# Altium PCB EM_Power_V2.PcbDoc (part 3 of 3)
Units mm, origin at the board's own origin, x right, y up, seen from the top; angles counter-clockwise.
Board outline 82 x 56 mm, 2 copper layers (Top Layer, Bottom Layer); 82 components, 61 nets, 273 pads, 201 vias.
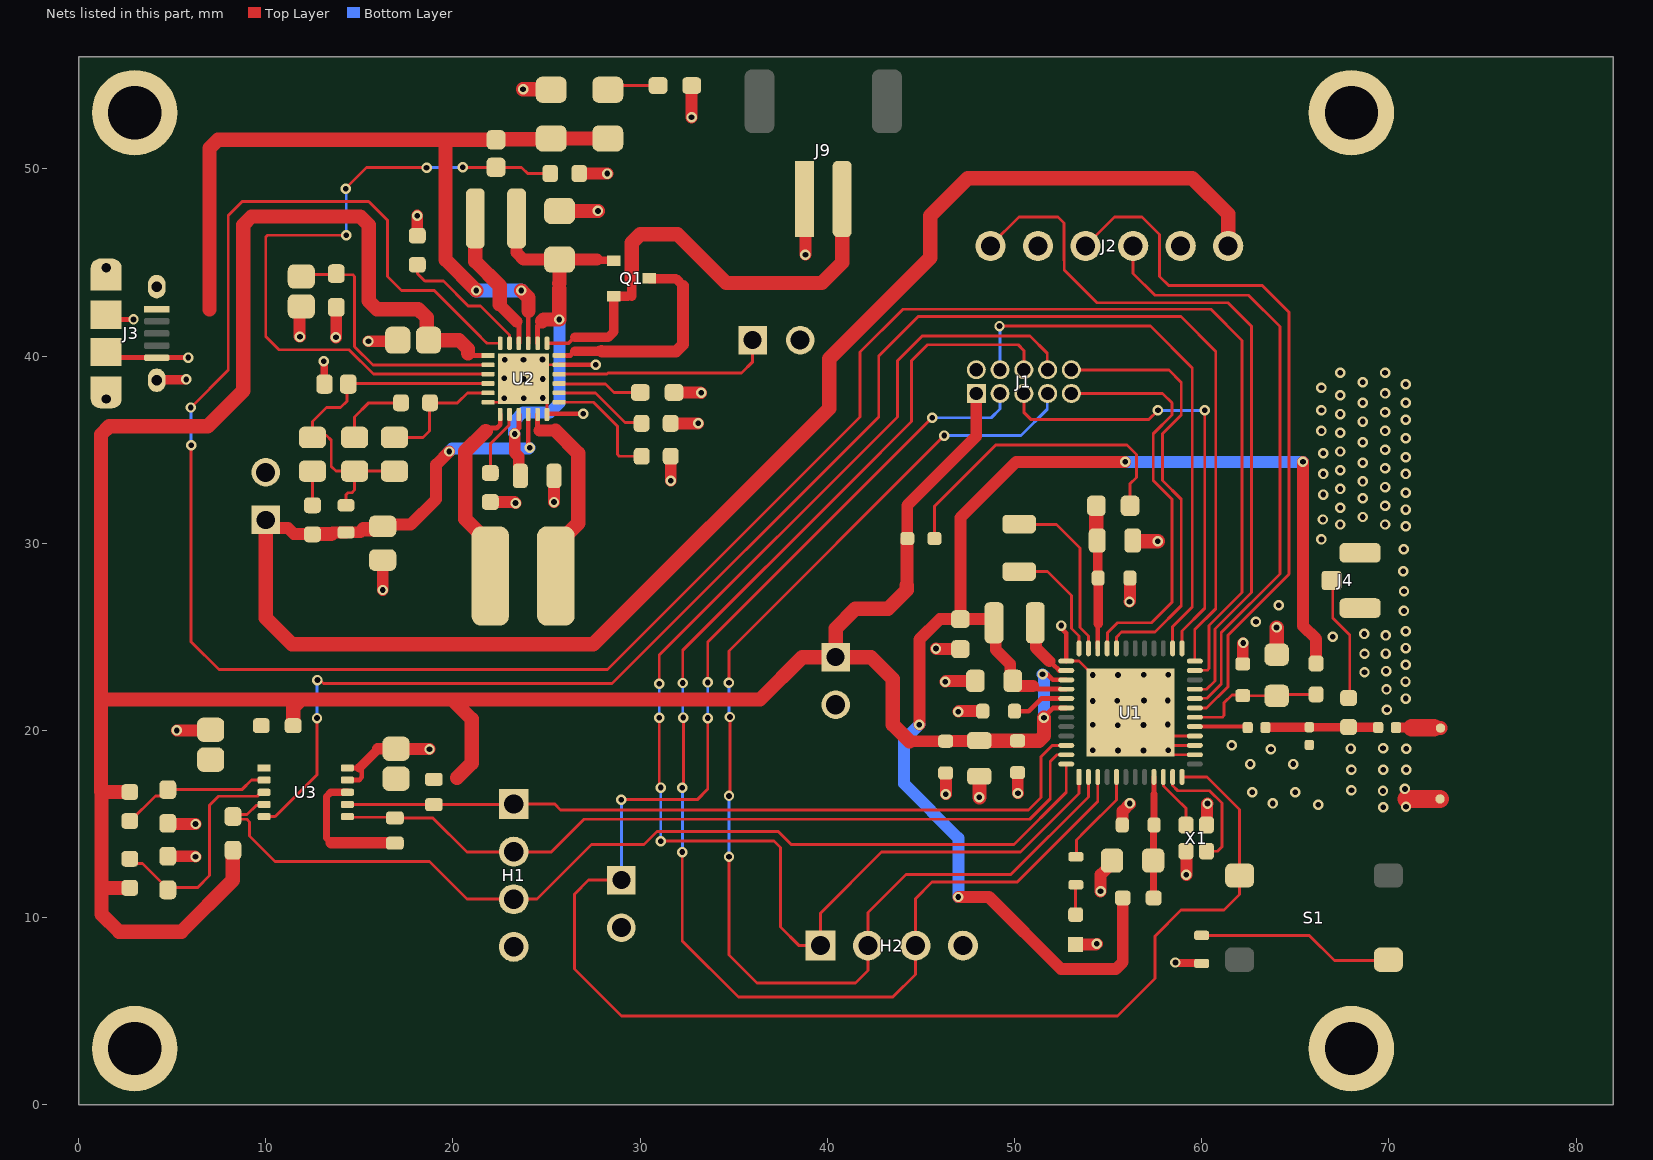
[diagram p2: the nets of this part, all layers, seen from the top]

## Part data (continued)
R8: library part RNCS0603BKE3K01, "RES SMD 3.01KOHM 0.1% 1/16W 0603", Case Code (Imperial)=0603, Case Code (Metric)=1608, Manufacturer="Stackpole Electronics", Max Operating Temperature=155°C, Max Power Dissipation=63mW, Min Operating Temperature=-55°C, Resistance=3.01kR, Resistor Type="Thin Film", Supplier Part Number 1=RNCS0603BKE3K01CT-ND, Temperature Coefficient=25ppm/°C, Tolerance=0.1%, Case/Package=0603, Category="Chip SMD Resistors", ComponentLink1Description=https://datasheet.ciiva.com/2528/sei-rncs-rnch-2528531.pdf?src-supplier=Digi-Key, ComponentLink1URL=https://datasheet.ciiva.com/2528/sei-rncs-rnch-2528531.pdf?src-supplier=Digi-Key, ComponentLink2Description=https://datasheet.ciiva.com/2528/sei-rncs-rnch-2528532.pdf?src-supplier=Digi-Key, ComponentLink2URL=https://datasheet.ciiva.com/2528/sei-rncs-rnch-2528532.pdf?src-supplier=Digi-Key, ComponentLink3Description=https://datasheet.ciiva.com/2528/sei-rncs-rnch-2528533.pdf?src-supplier=Digi-Key, ComponentLink3URL=https://datasheet.ciiva.com/2528/sei-rncs-rnch-2528533.pdf?src-supplier=Digi-Key, Contact Plating=Tin,Matte, Features="Moisture Resistant,Automotive AEC-Q200", Height=0.022inch, Lead Free="Lead Free", Length=0.061inch, Manufacturer Part Number=RNCS0603BKE3K01, Mount="Surface Mount", Number of Terminations=2, Packaging="Tape and Reel", Pricing 1="1=0.45000, 10=0.34500, 100=0.14500 (USD)", Radiation Hardening=No, RoHS=Yes, Stock 1=9600, Supplier 1=Digi-Key, Width=0.031inch
R9: library part 9-1879336-1, "RES SMD 2K OHM 1% 1/16W 0603", Case Code (Imperial)=0603, Case Code (Metric)=1608, Manufacturer="TE Connectivity", Max Operating Temperature=155°C, Max Power Dissipation=63mW, Min Operating Temperature=-55°C, Package Quantity=1000, Resistance=2kR, Resistor Type="Thin Film", Supplier Part Number 1=A102250CT-ND, Temperature Coefficient=50ppm/°C, Tolerance=1%, Case/Package=0603, Category="Chip SMD Resistors", ComponentLink1Description=https://datasheet.ciiva.com/2525/eng-cd-1879336-ba1-pdf-c-1879336-drw-2525209.pdf?src-supplier=Digi-Key, ComponentLink1URL=https://datasheet.ciiva.com/2525/eng-cd-1879336-ba1-pdf-c-1879336-drw-2525209.pdf?src-supplier=Digi-Key, Depth=0.8mm, Height=0.022inch, Lead Free="Lead Free", Length=0.061inch, Manufacturer Part Number=9-1879336-1, Military Standard=Not, Number of Terminations=2, Packaging="Tape and Reel", Pricing 1="1=0.17000, 10=0.14400, 100=0.05630 (USD)", Radiation Hardening=No, RoHS=Yes, Stock 1=17358, Supplier 1=Digi-Key, Width=0.031inch
R18: library part RMCF0603FT5K23, "RES SMD 5.23K OHM 1% 1/10W 0603", Case Code (Imperial)=0603, Case Code (Metric)=1608, Manufacturer="Stackpole Electronics", Max Operating Temperature=155°C, Max Power Dissipation=100mW, Min Operating Temperature=-55°C, Resistance=5.23kR, Resistor Type="Thick Film", Supplier Part Number 1=RMCF0603FT5K23CT-ND, Temperature Coefficient=100ppm/°C, Tolerance=1%, Case/Package=0603, Category="Chip SMD Resistors", ComponentLink1Description=https://www.seielect.com/Catalog/SEI-RMCF_RMCP.pdf?src-supplier=Digi-Key, ComponentLink1URL=https://www.seielect.com/Catalog/SEI-RMCF_RMCP.pdf?src-supplier=Digi-Key, ComponentLink2Description=https://www.seielect.com/catalog/SEI-Packaging.pdf?src-supplier=Digi-Key, ComponentLink2URL=https://www.seielect.com/catalog/SEI-Packaging.pdf?src-supplier=Digi-Key, ComponentLink3Description=https://www.seielect.com/catalog/SEI-RMCF_RMCP.pdf?src-supplier=Avnet, ComponentLink3URL=https://www.seielect.com/catalog/SEI-RMCF_RMCP.pdf?src-supplier=Avnet, Contact Plating=Tin,Matte, Features="Automotive AEC-Q200", Height=0.022inch, Lead Free="Lead Free", Length=0.061inch, Manufacturer Part Number=RMCF0603FT5K23, Mount="Surface Mount", Number of Terminations=2, Packaging="Tape and Reel", Pricing 1="1=0.10000, 10=0.01500, 100=0.00590, 1000=0.00265, 2500=0.00230 (USD)", Radiation Hardening=No, RoHS=Yes, Stock 1=51613, Supplier 1=Digi-Key, Width=0.031inch
R19 R26 R27: library part CPF0603F10KC1, "Res Thin Film 0603 10K Ohm 1% 1/16W ±50ppm/°C Molded SMD SMD Paper T/R", Case Code (Imperial)=0603, Case Code (Metric)=1608, Manufacturer="TE Connectivity Neohm", Max Operating Temperature=155°C, Min Operating Temperature=-55°C, Number of Resistors=1, Power Rating=63mW, Resistance=10kR, Resistor Type="Thin Film", Supplier Part Number 1=A102203CT-ND, Temperature Coefficient=50ppm/°C, Tolerance=1%, Voltage Rating=50V, Case/Package=0603, Category="Chip SMD Resistors", ComponentLink1Description=https://datasheet.ciiva.com/7789/eng-ds-1773200-j-7789563.pdf?src-supplier=Element14, ComponentLink1URL=https://datasheet.ciiva.com/7789/eng-ds-1773200-j-7789563.pdf?src-supplier=Element14, ComponentLink2Description=https://datasheet.ciiva.com/22692/1786775-22692861.pdf?src-supplier=Element14, ComponentLink2URL=https://datasheet.ciiva.com/22692/1786775-22692861.pdf?src-supplier=Element14, ComponentLink3Description=https://datasheet.ciiva.com/24494/29261eng-ds-1773200-f-24494553.pdf?src-supplier=Onlinecomponents.com, ComponentLink3URL=https://datasheet.ciiva.com/24494/29261eng-ds-1773200-f-24494553.pdf?src-supplier=Onlinecomponents.com, ELV=Compliant, Manufacturer Part Number=CPF0603F10KC1, Mount="Surface Mount", Number of Pins=2, Number of Terminations=2, Packaging="Tape and Reel", Pricing 1="1=0.17000, 10=0.14400, 100=0.05630 (USD)", Radiation Hardening=No, REACH SVHC=Unknown, RoHS=Yes, Stock 1=42911, Supplier 1=Digi-Key, Termination=Solder, Voltage Rating (DC)=50V, Width=0.8mm
R20 R21: library part MCT06030C4701FP500, "RES SMD 4.7K OHM 1% 1/8W 0603", Case Code (Imperial)=0603, Case Code (Metric)=1608, Manufacturer="Vishay Beyschlag", Max Operating Temperature=125°C, Max Power Dissipation=125mW, Min Operating Temperature=-55°C, Package Quantity=1, Resistance=4.7kR, Resistor Type="Thin Film", Supplier Part Number 1=MCT0603-4.70K-CFCT-ND, Temperature Coefficient=50ppm/°C, Tolerance=1%, Voltage Rating=75V, Case/Package=0603, Category="Chip SMD Resistors", ComponentLink1Description=https://datasheet.ciiva.com/8897/mc-pro-8897829.pdf?src-supplier=Avnet, ComponentLink1URL=https://datasheet.ciiva.com/8897/mc-pro-8897829.pdf?src-supplier=Avnet, ComponentLink2Description=https://datasheet.ciiva.com/2525/mc-pro-2525199.pdf?src-supplier=Digi-Key, ComponentLink2URL=https://datasheet.ciiva.com/2525/mc-pro-2525199.pdf?src-supplier=Digi-Key, ComponentLink3Description=https://datasheet.ciiva.com/16452/mc-pro-16452668.pdf?src-supplier=Future+Electronics, ComponentLink3URL=https://datasheet.ciiva.com/16452/mc-pro-16452668.pdf?src-supplier=Future+Electronics, ComponentLink4Description=https://datasheet.ciiva.com/2525/mc-pro-2525197.pdf?src-supplier=Digi-Key, ComponentLink4URL=https://datasheet.ciiva.com/2525/mc-pro-2525197.pdf?src-supplier=Digi-Key, ComponentLink5Description=https://datasheet.ciiva.com/2525/mc-pro-2525198.pdf?src-supplier=Digi-Key, ComponentLink5URL=https://datasheet.ciiva.com/2525/mc-pro-2525198.pdf?src-supplier=Digi-Key, Contact Plating=Tin, Depth=0.85mm, Height=0.022inch, Lead Free="Lead Free", Length=1.55mm, Manufacturer Part Number=MCT06030C4701FP500, Military Standard=Not, Mount="Surface Mount", Number of Terminations=2, Packaging="Tape and Reel", Power Rating=125mW, Pricing 1="1=0.16000, 10=0.13200, 100=0.05160, 1000=0.02160, 2500=0.01980 (USD)", Radiation Hardening=No, REACH SVHC="No SVHC", RoHS=Yes, Stock 1=67430, Supplier 1=Digi-Key, Voltage Rating (DC)=75V, Width=0.033inch
R22: library part SR0603FR-7T330RL, "RES SMD 0603 1/4W 1% 330 OHM", Manufacturer=Yageo, Supplier Part Number 1=YAG5835CT-ND, Category="Chip SMD Resistors", ComponentLink1Description=http://www.yageo.com/documents/recent/PYu-SR_D_F%20tol_RoHS_L_3.pdf?src-supplier=Digi-Key, ComponentLink1URL=http://www.yageo.com/documents/recent/PYu-SR_D_F%20tol_RoHS_L_3.pdf?src-supplier=Digi-Key, Manufacturer Part Number=SR0603FR-7T330RL, Pricing 1="1=0.71000, 10=0.52500, 100=0.30570, 1000=0.17143, 2500=0.16797 (USD)", RoHS=No, Stock 1=4990, Supplier 1=Digi-Key
S1: library part PTS645SL50SMTR92LFS, "TACTILE SWITCH, SPST, 0.05A, 12VDC", Color=Black, Current Rating=50mA, Manufacturer="ITT C&K", Max Operating Temperature=60°C, Max Voltage Rating (DC)=12V, Min Operating Temperature=-20°C, Operating Force=1.27N, Package Quantity=1, Supplier Part Number 1=CKN9088CT-ND, Actuator Material=Nylon,Polyamide, Actuator Type=Standard, Category="Tactile Switches", ComponentLink1Description=https://datasheet.ciiva.com/26927/getdatasheetpartid-760859-26927133.pdf?src-supplier=Verical, ComponentLink1URL=https://datasheet.ciiva.com/26927/getdatasheetpartid-760859-26927133.pdf?src-supplier=Verical, ComponentLink2Description=https://datasheet.ciiva.com/14920/pts645-14920742.pdf?src-supplier=Digi-Key, ComponentLink2URL=https://datasheet.ciiva.com/14920/pts645-14920742.pdf?src-supplier=Digi-Key, ComponentLink3Description=https://datasheet.ciiva.com/14920/pts645-14920743.pdf?src-supplier=Digi-Key, ComponentLink3URL=https://datasheet.ciiva.com/14920/pts645-14920743.pdf?src-supplier=Digi-Key, ComponentLink4Description=https://datasheet.ciiva.com/14920/pts645-14920744.pdf?src-supplier=Digi-Key, ComponentLink4URL=https://datasheet.ciiva.com/14920/pts645-14920744.pdf?src-supplier=Digi-Key, ComponentLink5Description=https://datasheet.ciiva.com/46429/1839862-46429337.pdf?src-supplier=Element14, ComponentLink5URL=https://datasheet.ciiva.com/46429/1839862-46429337.pdf?src-supplier=Element14, ComponentLink6Description=https://datasheet.ciiva.com/46429/1839862-46429338.pdf?src-supplier=Element14, ComponentLink6URL=https://datasheet.ciiva.com/46429/1839862-46429338.pdf?src-supplier=Element14, Contact Material=Bronze, Contact Plating=Silver, Depth=9mm, Illumination Type=Non-Illuminated, Lead Free="Lead Free", Length=6mm, Manufacturer Part Number=PTS645SL50SMTR92LFS, Max Current Rating=50mA, Mechanical Life=100000Cycles, Mount="Surface Mount", Orientation=Straight, Packaging="Tape and Reel", Pricing 1="1=0.25000, 10=0.24200, 25=0.22960, 100=0.20780, 250=0.18944, 500=0.17610 (USD)", REACH SVHC="No SVHC", RoHS=Yes, Stock 1=59621, Supplier 1=Digi-Key, Switch Function=Off-Mom, Termination="Gull Wing", Throw Configuration=SPST, Voltage Rating (DC)=12V
U1: "Blue Gecko EFR32BG13", Manufacturer="Silicon Labs", Supplier Part Number 1=336-6197-1-ND, Manufacturer Part Number=EFR32BG12P433F1024GM48-CR, Pricing 1="1=11.65000, 25=9.59720, 100=8.68300, 1000=6.39800 (USD)", RoHS=No, Stock 1=4670, Supplier 1=Digi-Key
U2: "IC, BATTERY CHARGER, 1.07A, QFN-24", Case/Package=QFN, Manufacturer="Analog Devices / Linear Technology", Max Charge Current=1.07A, Max Input Voltage=5.5V, Max Operating Temperature=85°C, Min Input Voltage=4.35V, Min Operating Temperature=-40°C, Package Quantity=91, Supplier Part Number 1=LTC3566EUF#PBF-ND, Category="Battery Management", ComponentLink1Description=https://datasheet.ciiva.com/1490/downloaddocument-donavid-h0-c1-c1003-c1037-c1773-p60353-d26142-1490075.pdf?src-supplier=Element14, ComponentLink1URL=https://datasheet.ciiva.com/1490/downloaddocument-donavid-h0-c1-c1003-c1037-c1773-p60353-d26142-1490075.pdf?src-supplier=Element14, ComponentLink2Description=https://datasheet.ciiva.com/1964/26142-1964844.pdf?src-supplier=Digi-Key, ComponentLink2URL=https://datasheet.ciiva.com/1964/26142-1964844.pdf?src-supplier=Digi-Key, Length=4mm, Manufacturer Part Number=LTC3566EUF#PBF, Number of Cells=1, Number of Outputs=1, Number of Pins=24, Packaging=Rail/Tube, Pricing 1="1=9.60000, 25=5.50000, 100=5.30700 (USD)", REACH SVHC="No SVHC", RoHS=Yes, Stock 1=211, Supplier 1=Digi-Key
U3: "IC 4CH IR SENSOR I2C 10SON", Case/Package=SMD/SMT, Manufacturer="AKM Semiconductor", Max Operating Temperature=85°C, Min Operating Temperature=-30°C, Supplier Part Number 1=974-1157-1-ND, Category=Sensors, Manufacturer Part Number=AK9753AE, Mount="Surface Mount", Output Type=I2C, Packaging="Cut Tape", Pricing 1="1=10.55000, 5=9.25000, 10=8.32500, 25=7.40000, 50=6.84500, 100=5.92000, 500=5.55000 (USD)", RoHS=No, Stock 1=1905, Supplier 1=Digi-Key
X1: library part "Q 38,40-JXS21-10-10/15-T1-FU-WA-LF", "±10ppm Crystal 10pF 4-SMD, No Lead", Manufacturer=Jauch, Supplier Part Number 1=1908-1209-1-ND, Manufacturer Part Number="Q 38,40-JXS21-10-10/15-T1-FU-WA-LF", Pricing 1="1=0.76000, 10=0.67600, 50=0.63220, 100=0.55860, 500=0.52920 (USD)", RoHS=No, Stock 1=4266, Supplier 1=Digi-Key
X2: library part ABS07AIG-32.768KHZ-D-T, "Crystals 32.768kHz AECQ200 12.5pF -40C +85C", Case/Package=SMD/SMT, ESR (Equivalent Series Resistance)=70kR, Frequency Tolerance=20ppm, Load Capacitance=12.5pF, Manufacturer=Abracon, Max Operating Temperature=85°C, Min Operating Temperature=-40°C, Ratings=AEC-Q200, Supplier Part Number 1=535-13356-1-ND, Category=Crystals, ComponentLink1Description=http://www.mouser.com/ds/2/3/ABS07AIG-783567.pdf?src-supplier=Mouser, ComponentLink1URL=http://www.mouser.com/ds/2/3/ABS07AIG-783567.pdf?src-supplier=Mouser, ComponentLink2Description=http://www.abracon.com/AIGcrystals/ABS07AIG.pdf?src-supplier=Digi-Key, ComponentLink2URL=http://www.abracon.com/AIGcrystals/ABS07AIG.pdf?src-supplier=Digi-Key, ComponentLink3Description=https://abracon.com/Support/flyer/AutoGrade-AIG-Crystals.pdf?src-supplier=Digi-Key, ComponentLink3URL=https://abracon.com/Support/flyer/AutoGrade-AIG-Crystals.pdf?src-supplier=Digi-Key, Frequency=32.768kHz, Height=0.035inch, Length=0.126inch, Manufacturer Part Number=ABS07AIG-32.768KHZ-D-T, Mount="Surface Mount", Packaging="Tape and Reel", Pricing 1="1=1.05000, 10=0.92700, 50=0.86680, 100=0.76610, 500=0.72576, 1000=0.60480 (USD)", RoHS=Yes, Stock 1=7575, Supplier 1=Digi-Key, Width=0.059inch

## Via types
v1: diameter 0.559, hole 0.305, Top Layer to Bottom Layer, tented both sides, 174 vias
v2: diameter 0.559, hole 0.305, Top Layer to Bottom Layer, 27 vias

## Nets (pads, with @x,y where several pads share a name; then routed paths per layer and width w, separated by ;. In a path a pad name is that pad's centre, name@x,y a point inside that pad or via, vN(x,y) a via of type N, cw(c..) or ccw(c..) an arc to the next point about the centre after c; other vN are vias at no path point)
2G4RF_IOP: L2.1 U1.17 | length 2.8
  Top Layer w0.229: U1.17@59.635,20.2 59.64,20.205 62.4,20.205 L2.1@62.457,20.149
+3V3_IR: C29.1 R22.1 U3.1 | length 0
  Top Layer w0.381: C29.1@7.058,18.436 C29.1@7.072,18.45
+3V3_LDO: C9.1 C10.2 C12.2 C22.1 C28.1 H6.1 J1.1 L6.2 R19.2 R20.2 R21.2 R22.2 R24.2 R25.2 U1.39 U1.42 U2.1 U3.8 | length 169
  Top Layer w0.152: 20.8,40.15 20.919,40.031 ; C10.2@46.275,19.422 C10.2@46.325,19.422
  Top Layer w0.254: 20.919,40.031 U2.1@21.875,40.031 ; v1(51.5,23) 51.75,23 52.05,22.7 U1.39@52.765,22.7 ; v1@51.556,20.694 52.062,21.2 U1.42@52.765,21.2
  Top Layer w0.381: 13.5,14 13.25,14.25 13.25,16.473 13.473,16.696 U3.8@14.363,16.696 ; C28.1@16.587,17.044 C28.1@16.964,17.42 C28.1@16.982,17.402 ; R21.2@16.875,14 R21.2@16.9,13.975 ; R20.2@18.949,17.402 18.974,17.378 R20.2@18.981,17.384 R20.2@19.012,17.353
  Top Layer w0.635: 13.5,14 R21.2@16.875,14 ; L6.2@44.275,30.25 44.275,32.025 47.96,35.71 J1.1@47.96,37.873 ; 44.387,19.422 C10.2@46.275,19.422 ; C10.2@46.325,19.422 46.341,19.438 48.105,19.438 C9.1@48.121,19.454
  Top Layer w0.686: 44.25,27.75 L6.2@44.25,30.225
  Top Layer w0.762: 1.2,16.738 1.2,21.65 ; R25.2@2.74,11.59 2.732,11.582 1.229,11.582 ; R24.2@2.74,16.709 1.229,16.709 1.229,11.582 ; R19.2@8.25,13.6 8.244,13.606 8.244,11.994 5.5,9.25 2.158,9.25 1.229,10.179 1.229,11.582 ; R22.2@11.464,20.252 11.464,21.204 11.91,21.65 ; 20.218,17.468 21,18.25 21,20.604 19.954,21.65 ; 20.8,40.15 20.8,40.371 20.321,40.85 C22.1@18.7,40.85 18.6,40.95 18.6,42.054 18.154,42.5 15.946,42.5 15.5,42.946 15.5,47.004 15.054,47.45 9.246,47.45 8.8,47.004 8.8,38.15 6.9,36.25 1.646,36.25 1.2,35.804 1.2,21.65 ; 44.25,27.75 44.25,27.5 43.25,26.5 41.5,26.5 40.449,25.449 H6.1@40.449,23.91 ; 44.387,19.422 43.5,20.309 43.5,22.75 42.34,23.91 H6.1@40.449,23.91 ; C9.1@48.121,19.454 48.124,19.451 49.907,19.451 49.91,19.448 50.163,19.448 51.31,19.448 51.575,19.713 v1(51.575,20.676) ; 1.2,21.65 11.91,21.65 ; 11.91,21.65 19.954,21.65 ; 19.954,21.65 36.4,21.65 38.66,23.91 H6.1@40.449,23.91
  Bottom Layer w0.635: v1(51.5,23) 51.575,22.925 v1(51.575,20.676)
+3V3_VREGSW: C7.1 C8.2 L1.1 L4.1 L5.2 U1.40 | length 76
  Top Layer w0.254: 51.228,22.206 52.457,22.206 52.463,22.2 U1.40@52.765,22.2
  Top Layer w0.635: v1(44.918,20.306) 44.918,24.856 46.01,25.948 C8.2@47.11,25.948 ; v1(47,11.1) 48.64,11.1 52.49,7.25 53.65,7.25 55.413,7.25 55.785,7.622 L1.1@55.785,11.048 ; C7.1@49.772,22.686 49.772,23.541 49.003,24.31 49.003,25.656 L5.2@48.91,25.748 48.91,25.766 48.728,25.948 C8.2@47.11,25.948 ; C7.1@49.91,22.648 49.91,22.548 50.093,22.366 51,22.366 ; v1(55.913,34.346) 50.096,34.346 47.11,31.36 C8.2@47.11,25.948 ; v1(65.413,34.346) 65.413,25.587 66.11,24.89 L4.1@66.11,23.573
  Bottom Layer w0.635: v1(44.918,20.306) 44.1,19.488 44.1,17.15 47,14.25 v1(47,11.1) ; v1(55.913,34.346) v1(65.413,34.346)
+5V: C25.2 H7.1 J2.1 R14.2 R18.2 U2.10 | length 92.2
  Top Layer w0.254: U2.10@24.025,36.881 24.025,35.175 v1(24.1,35.1)
  Top Layer w0.635: H7.1@10,31.25 10.445,30.806 11.194,30.806 11.5,30.5 12.475,30.5 R14.2@12.5,30.475 ; 13.5,30.497 13.573,30.57 14.28,30.57 R18.2@14.288,30.578 14.295,30.585 15.06,30.585 15.225,30.75 ; C25.2@16.25,30.9 16.35,31 17.75,31 19.1,32.35 19.1,34.2 v1(19.8,34.9)
  Top Layer w0.762: H7.1@10,31.25 10,26 11.4,24.6 27.5,24.6 40.1,37.2 40.1,39.85 45.5,45.25 45.5,47.5 47.5,49.5 59.5,49.5 61.418,47.582 J2.1@61.418,45.879 ; R14.2@12.5,30.475 12.522,30.497 13.5,30.497 ; 15.225,30.75 16.1,30.75 C25.2@16.25,30.9
  Bottom Layer w0.635: v1(19.8,34.9) 19.952,35.052 24.052,35.052 v1(24.1,35.1)
AVDD: C6.2 C11.2 R4.2 U1.34 | length 7.7
  Top Layer w0.152: 54.41,25.748 54.45,25.708
  Top Layer w0.254: U1.34@54.45,24.385 54.45,25.708
  Top Layer w0.508: C6.2@54.375,30.149 54.443,30.081 54.443,28.166 C11.2@54.468,28.141 54.468,25.699 54.474,25.694
  Top Layer w0.762: C6.2@54.375,30.149 R4.2@54.375,32.001
BAT: J9.2 Q1.2 U2.19 | length 25.9
  Top Layer w0.203: U2.19@25.025,40.681 26.181,40.681 26.5,41
  Top Layer w0.381: 29.337,43.2 29.543,43.2
  Top Layer w0.508: 26.5,41 28.302,41 28.6,41.298 Q1.2@28.6,43.2 29.337,43.2 ; 29.543,43.2 29.543,44.043 29.56,44.06
  Top Layer w0.762: 29.56,44.06 29.56,46.054 30.006,46.5 32,46.5 34.6,43.9 39.7,43.9 40.8,45 J9.2@40.8,48.391
BL: J2.5
C\H\R\G\: H3.1 U2.16 | length 11.8
  Top Layer w0.152: U2.16@25.675,39.031 28.231,39.031 28.3,39.1 35.419,39.1 36.014,39.695 H3.1@36.014,40.85
C\H\R\G\E\N\: R11.2 U2.23 | length 7.2
  Top Layer w0.152: R11.2@18.1,44.875 18.1,44.4 18.5,44 19.5,44 20.823,42.677 21.473,42.677 23.019,41.131 23.019,40.688 U2.23@23.025,40.681
CAD0: R24.1 R26.2 U3.2 | length 8.1
  Top Layer w0.152: R24.1@2.74,15.159 2.765,15.159 4.108,16.502 4.44,16.502 R26.2@4.772,16.834 8.72,16.834 9.232,17.346 U3.2@9.913,17.346
CAD1: R25.1 R27.2 U3.3 | length 12.2
  Top Layer w0.152: R25.1@2.74,13.14 2.998,12.881 3.418,12.881 4.772,11.528 R27.2@4.772,11.478 4.91,11.616 6.366,11.616 7,12.25 7,16 7.486,16.486 9.55,16.486 9.76,16.696 U3.3@9.913,16.696
CLPROG: C20.1 R8.2 U2.2 | length 14.3
  Top Layer w0.152: C20.1@11.9,44.25 12.002,44.352 13.715,44.352 R8.2@13.767,44.404 13.831,44.341 14.661,44.341 14.75,44.252 14.75,40.5 15.725,39.525 21.869,39.525 U2.2@21.875,39.531
DECOUPLE: C13.2 U1.41 | length 3
  Top Layer w0.254: C13.2@50.006,21.028 50.753,21.028 51.429,21.704 52.46,21.704 52.463,21.7 U1.41@52.765,21.7
FB1: C16.2 C24.1 C26.1 R2.2 R18.1 U2.4 | length 19.7
  Top Layer w0.152: R18.1@14.288,32.028 14.288,32.588 14.4,32.7 14.611,32.7 14.75,32.839 C24.1@14.75,33.85 ; C26.1@16.875,33.85 C24.1@14.75,33.85 ; U2.4@21.875,38.531 14.441,38.531 14.351,38.441 14.351,37.601 14,37.25 13.25,37.25 12.5,36.5 C16.2@12.5,35.65 12.6,35.75 13.25,35.75 13.5,35.5 13.5,34.1 13.75,33.85 C24.1@14.75,33.85
GATE: Q1.3 U2.18 | length 12
  Top Layer w0.254: U2.18@25.675,40.031 26.281,40.031 26.5,40.25
  Top Layer w0.508: 26.5,40.25 27.75,40.25 27.776,40.276 27.948,40.276 ; Q1.3@30.5,44.15 30.514,44.136 31.917,44.136 32.3,43.753
  Top Layer w0.635: 27.948,40.276 27.974,40.25 31.928,40.25 32.3,40.622 32.3,43.753
GND: AT1.1 C1.1 C2.2 C3.2 C4.1 C5.2 C6.1 C7.2 C8.1 C9.2 C10.1 C11.1 C12.1 C13.1 C18.2 C20.2 C21.2 C22.2 C23.1 C25.1 C28.2 C29.2 D1.2 H1.4 H2.4 H3.2 H5.2 H6.2 H7.2 J1.2 J2.2 J3.5 J3.S1 J3.S2 J3.S3 J3.S4 J3.S5 J3.S6 J4.G1 J4.G2 J9.1 MH1.1 MH2.1 MH3.1 MH4.1 R2.1 R3.1 R7.1 R8.1 R9.1 R10.1 R11.1 R12.1 R13.1 R15.1 R26.1 R27.1 U1.0 U1.14 U1.15 U1.16 U1.37 U2.6 U2.12 U2.17 U2.25 U3.9 U3.10 X1.2 X1.4 | length 96.4
  Top Layer w0.152: J3.S2@4.177,38.707 J3.S2@4.199,38.728 ; R26.1@4.772,15.034 R26.1@4.806,15 ; v1@5.728,38.728 v1(5.75,38.75) ; C29.2@6.842,20.252 C29.2@7.058,20.036 C29.2@7.022,20 ; R8.1@13.75,42.587 R8.1@13.767,42.604 ; 15.045,17.996 15.134,17.907 ; C28.2@16.964,19.02 C28.2@16.984,19 ; R11.1@18.096,46.429 R11.1@18.1,46.425 ; U2.6@21.875,37.531 22.526,37.531 v2(23.772,38.777) ; R15.1@22,32.2 R15.1@22.008,32.208 ; U2.12@25.074,36.924 25.031,36.881 U2.12@25.025,36.881 25.025,37.523 v2(23.772,38.777) ; C21.2@25.224,54.25 C21.2@25.251,54.223 C21.2@25.376,54.223 ; C23.1@25.5,33.4 C23.1@25.508,33.392 ; U2.17@25.675,39.531 24.526,39.531 v2(23.772,38.777) ; R7.1@32.75,54.44 R7.1@32.759,54.449 ; J9.1@38.73,48.441 J9.1@38.78,48.391 ; H6.2@40.431,21.352 H6.2@40.449,21.37 ; v1@52.5,25.463 v1(52.5,25.6) ; U1.37@52.765,23.7 53.45,23.7 U1.0@56.2,20.95 U1.0@57.45,19.7 ; D1.2@53.269,8.552 53.163,8.446 D1.2@53.299,8.31 ; C2.2@55.21,12.91 C2.2@55.21,13.048 ; C1.1@55.663,14.851 C1.1@55.76,14.948 C1.1@55.781,14.969 ; v1@56.163,16.07 v1(56.163,16.096) v1@56.413,16.096 ; U1.0@57.85,19.3 U1.0@57.45,19.7 ; J2.2@58.911,45.945 J2.2@58.941,45.975 ; U1.14@59.635,18.7 58.45,18.7 57.95,19.2 U1.15@59.635,19.2 ; U1.16@59.635,19.7 U1.0@57.45,19.7 ; v1@62.196,24.65 v1(62.22,24.674) ; v1(70.862,16.875) 70.917,16.819 v1(70.917,15.917)
  Top Layer w0.254: J3.S4@1.477,42.207 1.729,41.955 1.73,41.956 v2(2.937,41.956) ; J3.S5@1.767,39.917 v1(5.868,39.917) 5.862,39.912 4.183,39.912 J3.5@4.177,39.907 ; U3.9@14.363,17.346 14.985,17.346 15.134,17.495 15.134,17.907 ; U3.10@14.363,17.996 14.996,17.996 15.045,17.996 ; U2.12@25.074,36.924 25.087,36.912 v1(26.964,36.912) ; U2.17@25.675,39.531 25.677,39.533 27.619,39.533 v1(27.625,39.539) ; v1@52.5,25.463 52.765,25.198 U1.37@52.765,23.7
  Top Layer w0.406: v1(13.1,39.722) 13.12,39.702 13.12,38.52 R2.1@13.14,38.5 R2.1@13.275,38.635 ; v2(58.6,7.6) 58.625,7.575 59.975,7.575 R3.1@60,7.55
  Top Layer w0.508: J3.S2@4.199,38.728 v1@5.728,38.728 ; 14.996,17.996 15.986,18.986 15.986,19.02
  Top Layer w0.635: R27.1@4.772,13.278 6.215,13.278 6.243,13.25 v1(6.25,13.25) ; R26.1@4.806,15 v1(6.25,15) ; v1(5.25,20) C29.2@7.022,20 ; v1(11.829,41.029) 11.808,41.051 11.808,42.558 C20.2@11.9,42.65 ; v1(13.75,41) 13.75,41.007 13.767,41.024 R8.1@13.767,42.604 ; v1(15.489,40.788) 16.988,40.788 C22.2@17.05,40.85 ; 15.986,19.02 C28.2@16.964,19.02 ; v1(16.25,27.5) C25.1@16.25,29.1 ; C28.2@16.984,19 v1(18.75,19) ; R11.1@18.096,46.429 v1(18.096,47.5) ; R15.1@22,32.2 23.293,32.2 v1(23.349,32.144) ; v1(25.4,32.2) C23.1@25.4,33.6 ; R10.1@26.75,49.75 v1(28.25,49.75) ; R13.1@31.63,36.403 v1@33.101,36.404 ; R12.1@31.635,34.646 R12.1@31.635,34.646 31.637,33.337 v1(31.638,33.335) ; R9.1@31.812,38.054 33.236,38.054 33.255,38.035 v1(33.262,38.035) v1@33.267,38.03 ; v1(32.75,52.75) R7.1@32.75,54.44 ; J9.1@38.78,48.391 38.833,48.338 v1(38.833,45.415) ; v1(45.809,24.374) 45.834,24.348 C8.1@47.11,24.348 ; C10.1@46.258,17.655 C10.1@46.325,17.722 ; v1(46.3,22.6) 46.344,22.644 47.906,22.644 C7.2@47.91,22.648 ; v1(46.334,16.59) C10.1@46.334,17.395 ; v1(47,21) 47.007,21 47.034,21.028 C13.1@48.306,21.028 ; C12.1@50.163,17.746 50.177,17.732 50.177,16.655 v1(50.184,16.648) ; D1.2@53.269,8.552 54.352,8.552 v1(54.4,8.6) ; v1(54.6,11.4) 54.6,12.3 C2.2@55.21,12.91 ; C1.1@55.781,14.969 55.781,15.688 v1@56.163,16.07 ; v1(56.146,26.88) 56.168,26.903 C11.1@56.168,28.141 ; X1.4@59.16,13.548 59.184,13.524 v1(59.184,12.285) ; X1.2@60.26,14.948 60.292,14.98 60.292,16.065 60.313,16.085 v1(60.313,16.092) ; C4.1@62.196,23.554 v1@62.196,24.65
  Top Layer w0.762: v1(23.75,54.25) C21.2@25.224,54.25 ; C18.2@25.7,47.75 v1(27.75,47.75) ; C9.2@48.121,17.554 48.126,17.55 v1(48.126,16.428) ; C6.1@56.318,30.141 56.351,30.108 57.652,30.108 v1(57.655,30.105) ; v1(64,25.5) 64.01,25.49 C5.2@64.01,24.048
  Top Layer w0.965: 70.945,16.34 AT1.1@72.735,16.34
  other v1: 69.7,15.9 66.234,16.022 63.8,16.1 62.7,16.7 65,16.7 69.689,16.766 68,16.8 68,17.9 69.7,17.9 70.937,17.903 62.6,18.2 64.9,18.2 63.7,19 67.957,19.03 70.929,19.02 69.693,19.048 61.6,19.2 69.9,21.1 70.9,21.7 69.874,22.187 70.89,22.609 68.7,23.1 69.852,23.168 70.9,23.5 68.7,24.1 69.829,24.104 70.9,24.4 67,25 69.84,25.075 68.679,25.152 70.9,25.3 62.9,25.8 70.805,26.383 64.114,26.69 70.809,27.432 70.772,28.51 70.793,29.685 66.4,30.2 70.9,30.9 67.4,31 69.8,31 66.48,31.266 68.6,31.4 70.9,31.8 67.4,31.9 69.8,32 68.6,32.4 66.5,32.6 70.9,32.7 67.4,32.9 69.8,33 68.6,33.3 66.5,33.7 70.9,33.7 67.4,33.9 69.8,34 68.6,34.3 70.9,34.6 66.5,34.8 67.4,34.9 69.8,35 68.6,35.4 70.9,35.6 67.4,35.9 66.4,36 69.8,36 33.101,36.404 68.6,36.5 70.9,36.6 67.4,36.9 69.8,37 66.4,37.1 68.6,37.5 70.9,37.5 67.4,37.9 69.8,38 66.4,38.3 70.9,38.5 68.6,38.6 67.4,39.1 69.8,39.1
  other v2: 55.533,18.925 56.894,18.929 58.218,18.932 54.189,18.943 55.52,20.268 54.179,20.298 56.89,20.29 58.186,20.313 54.183,21.57 55.493,21.58 56.919,21.603 58.196,21.592 54.186,22.964 55.534,22.965 56.905,22.966 58.218,22.967 22.747,37.751 23.79,37.747 24.792,37.753 24.792,38.778 22.737,38.807 22.767,39.795 23.77,39.799 24.788,39.81
HFXTAL_N: U1.10 X1.3 | length 3.1
  Top Layer w0.152: U1.10@57.95,17.515 57.968,17.497 57.968,17.031 58.607,16.392 ; 58.608,16.392 59.16,15.84 X1.3@59.16,14.948
HFXTAL_P: U1.11 X1.1 | length 6.7
  Top Layer w0.152: U1.11@58.45,17.515 58.45,17.05 58.725,16.775 60.425,16.775 61.082,16.118 61.082,13.782 60.848,13.548 X1.1@60.26,13.548
ILIM0: R12.2 U2.13 | length 6.6
  Top Layer w0.152: U2.13@25.723,37.483 U2.13@25.675,37.531 27.519,37.531 28.8,36.25 28.8,34.735 28.889,34.646 R12.2@30.085,34.646
ILIM1: R13.2 U2.14 | length 5.1
  Top Layer w0.152: U2.14@25.675,38.031 27.619,38.031 29.2,36.45 30.032,36.45 R13.2@30.08,36.403
IR_INT: H1.3 R19.1 U1.48 U3.4 | length 53.2
  Top Layer w0.152: U3.4@9.913,16.046 9.867,16 9.5,16 9,15.5 8.35,15.5 R19.1@8.25,15.4 8.4,15.25 9,15.25 9.141,15.109 9.141,14.359 10.5,13 18.75,13 20.75,11 23.23,11 H1.3@23.25,10.98 23.27,11 24.5,11 27.4,13.9 30.203,13.9 30.896,14.593 37.382,14.593 38.075,13.9 49.966,13.9 52.765,16.699 U1.48@52.765,18.2
IR_PDN: U1.24 U3.5 | length 84.7
  Top Layer w0.152: U3.5@9.913,15.396 10.505,15.396 12.739,17.63 v1(12.739,20.659) ; v1(12.762,22.689) 12.904,22.689 13.093,22.5 28.5,22.5 42.75,36.75 42.75,40 44.858,42.108 58.892,42.108 60.75,40.25 60.75,26.503 59.635,25.388 U1.24@59.635,23.7
  Bottom Layer w0.152: v1(12.739,20.659) 12.739,22.665 v1(12.762,22.689)
IR_SCL: H1.1 R20.1 U1.46 U3.7 | length 41.3
  Top Layer w0.152: U3.7@14.363,16.046 14.369,16.04 18.975,16.04 R20.1@18.981,16.034 23.224,16.034 H1.1@23.25,16.06 25.44,16.06 25.75,15.75 50.75,15.75 51.413,16.413 51.413,18.596 52.016,19.2 U1.46@52.765,19.2
IR_SDA: H1.2 R21.1 U1.47 U3.6 | length 42.5
  Top Layer w0.152: U3.6@14.363,15.396 14.398,15.361 16.864,15.361 R21.1@16.9,15.325 18.925,15.325 20.75,13.5 23.23,13.5 H1.2@23.25,13.52 23.27,13.5 25.25,13.5 27,15.25 50.816,15.25 51.913,16.346 51.913,18.346 52.265,18.698 52.763,18.698 U1.47@52.765,18.7
LE_UART_RX0: J2.3 U1.20 | length 32.6
  Top Layer w0.152: J2.3@56.338,45.879 56.338,44.412 57.5,43.25 62.5,43.25 64.18,41.57 64.18,28.364 61.05,25.234 61.05,22.487 60.284,21.721 59.656,21.721 U1.20@59.635,21.7
LE_UART_TX0: J2.4 U1.19 | length 38.5
  Top Layer w0.152: J2.4@53.798,45.879 55.352,47.433 56.818,47.433 57.75,46.501 57.75,44.25 58.238,43.762 63.238,43.762 64.663,42.337 64.663,28.346 61.4,25.084 61.4,22.334 60.266,21.2 U1.19@59.635,21.2
LED: R5.1 U1.5 | length 5.2
  Top Layer w0.152: R5.1@53.28,13.25 53.31,13.28 53.31,14.148 53.81,14.648 55.45,16.288 U1.5@55.45,17.515
LFXTAL_N: U1.36 X2.1 | length 6.3
  Top Layer w0.152: X2.1@50.25,28.481 51.769,28.481 53.05,27.2 53.05,25.45 53.45,25.05 U1.36@53.45,24.385
LFXTAL_P: U1.35 X2.2 | length 9.3
  Top Layer w0.152: X2.2@50.25,31.019 50.269,31 52.25,31 53.5,29.75 53.5,25.5 53.95,25.05 U1.35@53.95,24.385
MODE: R15.2 U2.8 | length 3.6
  Top Layer w0.152: R15.2@22,33.75 22,35.31 22.993,36.303 22.993,36.849 U2.8@23.025,36.881
NetAT1_2: AT1.2 L3.2 | length 2.4
  Top Layer w0.533: L3.2@70.38,20.149 71.222,20.149
  Top Layer w0.762: 72.412,20.149 72.437,20.123 AT1.2@72.76,20.123
  Top Layer w0.94: 71.222,20.149 72.412,20.149
NetC3_1: C3.1 L2.2 L3.1 R1.1 | length 6.1
  Top Layer w0.152: C3.1@65.752,20.173 C3.1@65.756,20.178 ; R1.1@67.843,20.178 R1.1@67.848,20.182
  Top Layer w0.457: C3.1@65.756,20.178 R1.1@67.843,20.178
  Top Layer w0.508: L2.2@63.407,20.149 63.421,20.162 65.741,20.162 C3.1@65.752,20.173 ; R1.1@67.848,20.182 67.874,20.156 69.423,20.156 L3.1@69.43,20.149
NetC4_2: C4.2 C5.1 L4.2 U1.18 | length 7.4
  Top Layer w0.152: U1.18@59.635,20.7 61.111,20.7 61.2,20.789 61.2,21.475 61.623,21.898 62.152,21.898 C4.2@62.196,21.854 64.004,21.854 C5.1@64.01,21.848 64.085,21.923 L4.2@66.11,21.923
NetC16_1: C16.1 R14.1 | length 1.8
  Top Layer w0.152: R14.1@12.5,32.025 C16.1@12.5,33.85
NetC19_2: C19.2 R7.2 | length 2.8
  Top Layer w0.152: C19.2@28.275,54.223 28.501,54.449 R7.2@30.959,54.449
NetC24_2: C24.2 R17.2 | length 4
  Top Layer w0.152: C24.2@14.75,35.65 14.75,36.75 15.5,37.5 R17.2@17.225,37.5 R17.2@17.225,37.599
NetD1_1: D1.1 R5.2 | length 1.6
  Top Layer w0.152: D1.1@53.269,10.152 R5.2@53.269,11.739
NetJ4_FEED: J4.FEED R1.2 | length 6.7
  Top Layer w0.152: J4.FEED@66.94,28.011 67,27.951 67,26 67.91,25.09 67.91,24.75 67.91,21.795 R1.2@67.848,21.732
NetL6_1: L6.1 R4.1 | length 17
  Top Layer w0.152: L6.1@45.725,30.25 45.725,31.975 49,35.25 56.009,35.25 56.519,34.74 56.519,33.519 56.175,33.175 R4.1@56.175,32.001
NetR3_2: R3.2 S1.4 | length 10.6
  Top Layer w0.152: R3.2@60,9.05 65.75,9.05 67.1,7.7 69.925,7.7 S1.4@69.975,7.75
NTC: R6.1 R10.2 U2.3 | length 36.4
  Top Layer w0.152: v1(14.27,48.944) 15.393,50.066 v1(18.594,50.066) ; v1(14.3,46.45) 10.089,46.45 10,46.361 10,41.05 10.712,40.338 14.447,40.338 15.753,39.031 U2.3@21.875,39.031 ; v1(20.53,50.081) 22.299,50.081 R6.1@22.3,50.08 23.67,50.08 24,49.75 R10.2@25.2,49.75
  Bottom Layer w0.152: v1(14.27,48.944) 14.3,48.914 v1(14.3,46.45) ; v1(18.594,50.066) 20.515,50.066 v1(20.53,50.081)
PMIC_EN: U1.23 U2.24 | length 129.9
  Top Layer w0.152: v1(6,37.25) 8,39.25 8,47.5 8.75,48.25 15.5,48.25 16.5,47.25 16.5,44.25 17.25,43.5 19,43.5 21.25,41.25 21.75,40.75 ; v1(6.016,35.229) 6.016,24.734 7.5,23.25 28.25,23.25 41.75,36.75 41.75,40.21 44.04,42.5 60.5,42.5 62.163,40.837 62.163,27.369 60.4,25.606 60.4,23.3 60.311,23.211 59.646,23.211 U1.23@59.635,23.2 ; 21.75,40.75 21.819,40.681 U2.24@22.525,40.681
  Bottom Layer w0.152: v1(6,37.25) 6.016,37.234 v1(6.016,35.229)
PROG: R9.2 U2.15 | length 4.5
  Top Layer w0.152: U2.15@25.675,38.531 25.707,38.5 28.15,38.5 28.6,38.05 30.008,38.05 R9.2@30.012,38.054
PTI_DATA: J1.10 U1.32 | length 23.7
  Top Layer w0.152: J1.10@53.04,39.27 53.06,39.25 58.25,39.25 58.913,38.587 58.913,36.846 57.913,35.846 57.913,33.346 58.913,32.346 58.913,26.663 57.5,25.25 55.721,25.25 55.45,24.979 U1.32@55.45,24.385
PTI_FRAME: J1.9 U1.33 | length 22
  Top Layer w0.152: J1.9@53.04,38 57.913,38 58.413,37.5 58.413,36.846 57.413,35.846 57.413,33.346 58.413,32.346 58.413,26.846 57.316,25.75 55.5,25.75 54.969,25.219 54.969,24.404 U1.33@54.95,24.385
RESETn: H5.1 J1.3 S1.1 U1.12 | length 95.3
  Top Layer w0.152: H5.1@28.314,11.314 H5.1@29,12 27.25,12 26.5,11.25 26.5,7.25 29,4.75 55.5,4.75 57.5,6.75 57.5,9 58.9,10.4 61.2,10.4 62.025,11.225 S1.1@62.025,12.25 62.025,15.775 60.285,17.515 U1.12@58.95,17.515 ; v1(28.999,16.3) 33.05,16.3 33.613,16.863 v1(33.613,20.66) ; v1(33.614,22.563) 33.614,24.714 v1(45.6,36.7)
  Bottom Layer w0.152: v1(28.999,16.3) v1(28.999,16.3) H5.1@29,12 ; v1(33.613,20.66) 33.614,20.661 v1(33.614,22.563) ; v1(45.6,36.7) 48.756,36.7 49.23,37.174 J1.3@49.23,38
RFVDD: C1.2 C2.1 L1.2 U1.9 | length 6.6
  Top Layer w0.254: 57.41,16.548 57.45,16.588 U1.9@57.45,17.515
  Top Layer w0.381: L1.2@57.435,11.048 57.423,11.061 57.423,13.036 C2.1@57.41,13.048 57.435,13.073 57.435,14.923 C1.2@57.46,14.948 57.46,16.588
RST: J2.6 U1.21 | length 39.4
  Top Layer w0.152: J2.6@48.781,45.975 50.239,47.433 52.318,47.433 52.65,47.101 52.65,45.1 52.658,45.092 52.658,44.593 54.403,42.848 61.402,42.848 62.663,41.587 62.663,27.375 60.705,25.417 60.705,22.638 60.266,22.2 U1.21@59.635,22.2
SW: L7.1 U2.22 | length 7.7
  Top Layer w0.152: 23.395,41.895 23.395,41.855 23.525,41.725
  Top Layer w0.254: U2.22@23.525,40.681 23.525,41.725
  Top Layer w0.635: 22.5,42.75 23.395,41.855
  Top Layer w0.762: L7.1@21.2,47.35 21.2,45.05 22.5,43.75 22.5,42.75
SWAB1: L8.1 U2.7 | length 10.2
  Top Layer w0.254: 21.75,36 21.905,36.155 22.343,36.155 22.523,36.336 22.523,36.879 U2.7@22.525,36.881
  Top Layer w0.635: L8.1@22,28.25 L8.1@22,29.954
  Top Layer w0.762: 21.75,36 20.662,34.912 20.662,31.292 L8.1@22,29.954
SWCD1: L8.2 U2.11 | length 10.5
  Top Layer w0.152: 24.525,36.123 24.623,36.025
  Top Layer w0.254: 24.525,36.123 U2.11@24.525,36.881
  Top Layer w0.635: 24.623,36.025 25.025,36.025 25.475,36.025
  Top Layer w0.762: 25.475,36.025 26.7,34.8 26.7,31.065 25.5,29.865 L8.2@25.5,28.25
SWCLK: H2.1 J1.8 U1.1 | length 73.2
  Top Layer w0.152: v1(31.021,20.68) 31.021,17.036 v1(31.11,16.947) ; v1(31.021,22.492) 31.021,24.021 43.75,36.75 43.75,39.75 45.075,41.075 50.825,41.075 51.75,40.15 51.75,39.29 J1.8@51.77,39.27 ; v1(31.107,14.085) 31.112,14.091 37.159,14.091 37.5,13.75 37.5,9.5 38.5,8.5 H2.1@39.63,8.5 39.63,10.23 42.9,13.5 50.316,13.5 53.45,16.634 U1.1@53.45,17.515
  Bottom Layer w0.152: v1(31.021,20.68) v1(31.021,22.492) ; v1(31.107,14.085) 31.107,16.944 v1(31.11,16.947)
SWDIO: H2.2 J1.7 U1.2 | length 66.3
  Top Layer w0.152: v1(34.746,22.553) 34.746,24.246 v1(46.25,35.75) ; v1(34.75,13.25) 34.75,8 36.25,6.5 41.5,6.5 42.17,7.17 H2.2@42.17,8.5 42.17,10.27 44.2,12.3 49.8,12.3 53.95,16.45 U1.2@53.95,17.515 ; v1(34.75,16.5) 34.798,16.548 v1(34.798,20.717)
  Bottom Layer w0.152: v1(34.746,22.553) 34.746,20.769 v1(34.798,20.717) ; v1(34.75,13.25) v1(34.75,16.5) ; v1(46.25,35.75) 50.346,35.75 51.75,37.154 51.75,37.98 J1.7@51.77,38
SWO: H2.3 J1.6 U1.3 | length 75.1
  Top Layer w0.152: v1(32.25,13.5) 32.25,8.75 35.25,5.75 43.5,5.75 44.71,6.96 H2.3@44.71,8.5 44.71,11.01 45.6,11.9 50.15,11.9 54.45,16.2 U1.3@54.45,17.515 ; v1(32.258,16.939) 32.312,16.993 v1(32.312,20.688) ; v1(32.282,22.533) 32.282,24.282 41.25,33.25 44.5,36.5 44.5,39.75 45.35,40.6 50.2,40.6 50.5,40.3 J1.6@50.5,39.27
  Bottom Layer w0.152: v1(32.25,13.5) 32.258,13.508 v1(32.258,16.939) ; v1(32.282,22.533) 32.282,20.718 v1(32.312,20.688)
VBUS: C19.1 C21.1 J3.1 R6.2 U2.21 | length 44.3
  Top Layer w0.152: U2.21@24.025,40.681 U2.21@24.03,40.686
  Top Layer w0.254: U2.21@24.03,40.686 24.03,42.418 24.033,42.421
  Top Layer w0.762: 7,42.487 7,51.104 7.446,51.55 19.7,51.55 ; v1(21.25,43.5) 19.6,45.15 19.6,51.45 19.7,51.55 ; v1(23.651,43.5) 24.033,43.119 24.033,42.421 ; C19.1@28.275,51.623 C21.1@25.251,51.623 25.214,51.587 22.337,51.587 R6.2@22.3,51.55 19.7,51.55
  Bottom Layer w0.762: v1(21.25,43.5) v1(23.651,43.5)
VC1: C26.2 R17.1 U2.5 | length 6.9
  Top Layer w0.152: C26.2@16.875,35.65 18.4,35.65 18.75,36 18.75,37.475 R17.1@18.775,37.5 20.25,37.5 20.781,38.031 U2.5@21.875,38.031
VCOM_RX: J1.4 U1.26 | length 29
  Top Layer w0.152: v1(49.2,41.6) 57.268,41.6 59.5,39.368 59.5,26.586 58.45,25.536 U1.26@58.45,24.385
  Bottom Layer w0.152: v1(49.2,41.6) 49.23,41.57 J1.4@49.23,39.27 J1.4@49.25,39.29
VCOM_TX: J1.5 U1.25 | length 24.2
  Top Layer w0.152: J1.5@50.5,38 50.5,37 50.9,36.6 57.166,36.6 v1(57.663,37.096) ; U1.25@58.95,24.385 58.95,25.317 60.163,26.53 v1(60.163,37.096)
  Bottom Layer w0.152: v1(57.663,37.096) v1(60.163,37.096)
VOUT: C18.1 C23.2 L7.2 Q1.1 U2.9 U2.20 | length 24.2
  Top Layer w0.152: 24.757,41.852 24.889,41.852 ; 25.686,43.58 25.686,43.893
  Top Layer w0.254: v1(23.302,35.839) 23.302,35.931 23.525,36.154 U2.9@23.525,36.881 ; U2.20@24.525,40.681 24.525,41.62 24.757,41.852
  Top Layer w0.381: 27.7,45.15 27.73,45.12 28.58,45.12 Q1.1@28.6,45.1
  Top Layer w0.635: v1(23.302,35.839) 23.302,34.838 23.517,34.623 23.517,33.683 C23.2@23.6,33.6 ; L7.2@23.4,47.35 23.4,45.522 23.772,45.15 C18.1@25.7,45.15 27.7,45.15
  Top Layer w0.762: 24.757,41.852 24.856,41.951 v1(25.686,41.951) 25.686,43.58 ; 25.686,43.893 25.7,43.906 C18.1@25.7,45.15
  Bottom Layer w0.635: v1(23.302,35.839) 23.269,35.873 23.269,36.519 23.739,36.989 25.189,36.989 25.686,37.486 v1(25.686,41.951)
VREGSW: L5.1 U1.38 | length 3.2
  Top Layer w0.254: 52.056,23.53 52.385,23.201 52.764,23.201 U1.38@52.765,23.2
  Top Layer w0.635: L5.1@51.11,25.748 51.145,25.713 51.145,24.414 51.865,23.695
pads on no net: J3.2 J3.3 J3.4 J9.NC1 J9.NC2 S1.2 S1.3 U1.4 U1.6 U1.7 U1.8 U1.13 U1.22 U1.27 U1.28 U1.29 U1.30 U1.31 U1.43 U1.44 U1.45
copper on no net: | length 11.7
  Top Layer w0.152: v1(43.147,17.907) 43.154,17.9 v1(45.046,17.9) ; v1@45.747,14.507 45.754,14.5 47.646,14.5 ; v1(45.976,12.907) 45.983,12.9 v1(47.875,12.9) ; v1@58.764,33.097 v1(58.764,33.347) v1@58.764,35.097 ; v1@61.437,33.264 v1(61.437,33.514) v1@61.437,35.264 ; v1@63.497,33.26 v1(63.497,33.51) v1@63.497,35.26
  other v1: 45.5,14.5 47.927,14.515 58.771,35.247 61.444,35.414 63.505,35.409

## Polygon pours and split planes (outlines as drawn)
GND on Top Layer "GND_L01_P011" (solid, pour order 11): 60.563,23.886 65.8,29.718 65.8,39.5 71.4,39.5 71.4,36.4 71.4,26.035 71.4,15.4 62.1,15.4 60.563,17.1
no net on Top Layer "NONET_L01_P008" (solid, pour order 8): 71.9,0.1
no net on Top Layer "NONET_L01_P007" (solid, pour order 7): 72.4,0
no net on Top Layer "NONET_L01_P006" (solid, pour order 6): 72.7,55.9
+3V3_LDO on Top Layer "+3V3_LDO_L01_P001" (solid, pour order 1): 14.034,16.857 14.032,16.521 15.237,16.521 15.703,16.782 17.788,16.782 18.261,17.069 19.373,17.069 19.373,17.703 18.298,17.702 17.975,18.025 16.947,18.062 16.122,18.032 14.961,16.871 14.048,16.871
VBUS on Top Layer "VBUS_L01_P003" (solid, pour order 3): 3.555,42.665 3.545,42.349 3.555,42.34 6.15,42.345 6.613,42.34 6.842,42.208 7.127,42.132 7.127,42.924 7.03,43.021 6.673,42.665 4.857,42.665
+3V3_LDO on Top Layer "+3V3_LDO_L01_P002" (solid, pour order 2): 18.663,17.033 19.336,17.033 19.399,17.096 20.304,17.096 20.304,17.682 20.269,17.717 18.663,17.717
+3V3_IR on Top Layer "+3V3_IR_L01_P000" (solid, pour order 0): 6.724,19.069 6.493,18.829 6.351,18.829 6.351,18.042 6.609,17.784 7.495,17.784 8.003,17.79 8.766,17.815 9.092,17.815 10.256,17.815 10.252,18.183 9.483,18.183 9.092,18.183 9.048,18.618 9.048,19.872 10.085,19.872 10.094,19.863 10.171,19.94 10.171,20.58 9.379,20.58 8.826,20.576 8.25,20 8.25,19.072 7.576,19.087
GND on Bottom Layer "GND_L02_P005" (solid, pour order 5): 0,0 71.4,0 71.4,56 0,56

## Keep-outs
Keep-Out Layer:
  the board outline again, w0.254

## Other copper
Top Layer:
  region net BAT: 27.927,40.773
  region net GND: 59.635,18.7

## Silkscreen, mask and mechanical layers (free items; w line width, h text height)
Top Overlay:
  lines w0.152: 0.993,23.237 1.052,23.297 21.307,23.297 21.307,9.05 21.263,9.006 1.006,9.006 1,9 1,23 1,23.23 ; 6,24.183 33.437,24.183 34,24.183 34,55.429 6,55.429 6,24.183
  text "Power Management / Circuit" at 7.257,52.39 h1.5
  text "Battery'" at 34.662,44.412 h1.5
  text "Fingerprint Sensor" at 46.579,42.946 h1.5
  text "USB" at 2.11,35.054 h1.5
  text "Mini-Simplicity / Connector" at 46.337,33.592 h1.5
  text "IR Sensor" at 14.447,9.687 h1.5
  text "LPEDT Fall 2020 / EM-Power / Gitanjali & Sarayu" at 5.97,1.007 h1

## Text inside footprints (layer, text, board x,y; h text height)
J2: Top Overlay "6" at 46.053,46.463 h1.97 r180; Top Overlay "1" at 64.762,46.513 h1.97 r180; Mechanical 13 "6" at 46.053,46.463 h1.97 r180; Mechanical 13 "1" at 64.762,46.513 h1.97 r180; Mechanical 30 "12.700" at 55.868,43.148 h0.39 r180; Mechanical 30 "15.748" at 55.868,57.474 h0.39 r180; Mechanical 30 "2.540" at 64.047,43.719 h0.39 r180; Mechanical 30 "8.509" at 65.05,51.784 h0.39 r180
J3: Mechanical 13 "pcb edge" at 0.127,42.332 h0.63 r270
J9: Top Overlay "-" at 36.607,45.907 h2.2; Top Overlay "+" at 42.066,45.995 h2.2